# Altium PCB PCB_VHDCI_breakout.PCBDOC (part 1 of 3)
Units mil, origin at the board's own origin, x right, y up, seen from the top; angles counter-clockwise.
Board outline 6299 x 3937 mil, 4 copper layers (TopLayer, Internal Plane 1, Internal Plane 2, BottomLayer), stack 35.551 mil thick; 61 components, 167 nets, 639 pads, 297 vias.
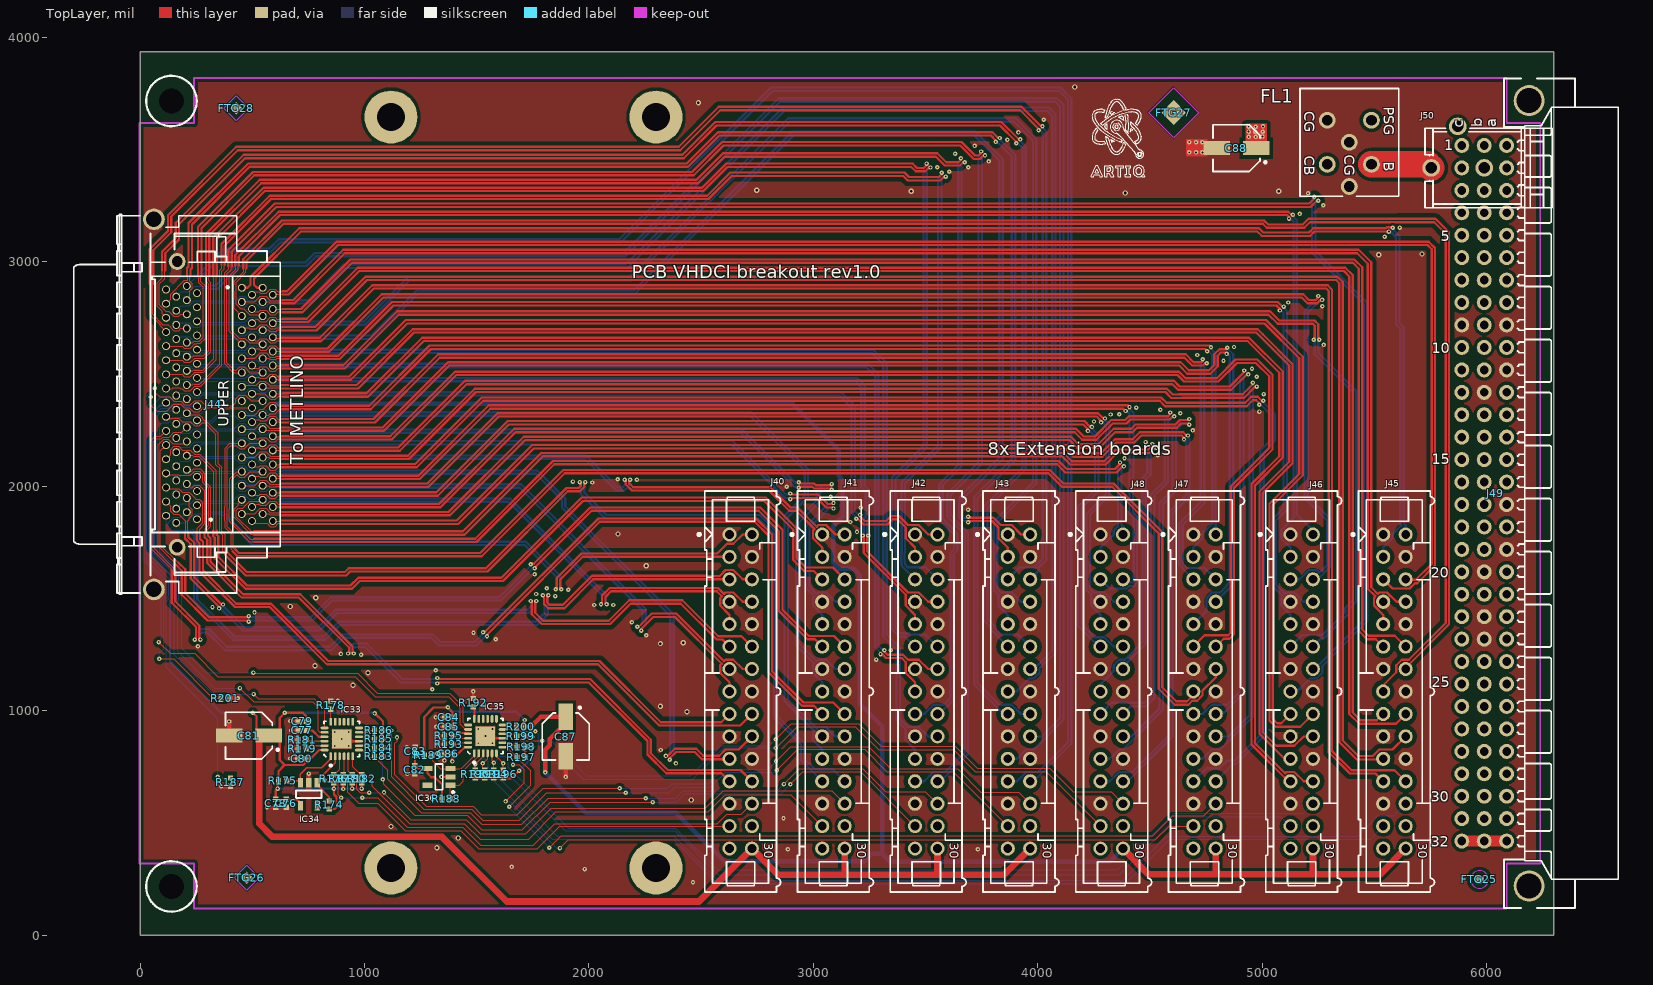
[diagram p0: TopLayer view]
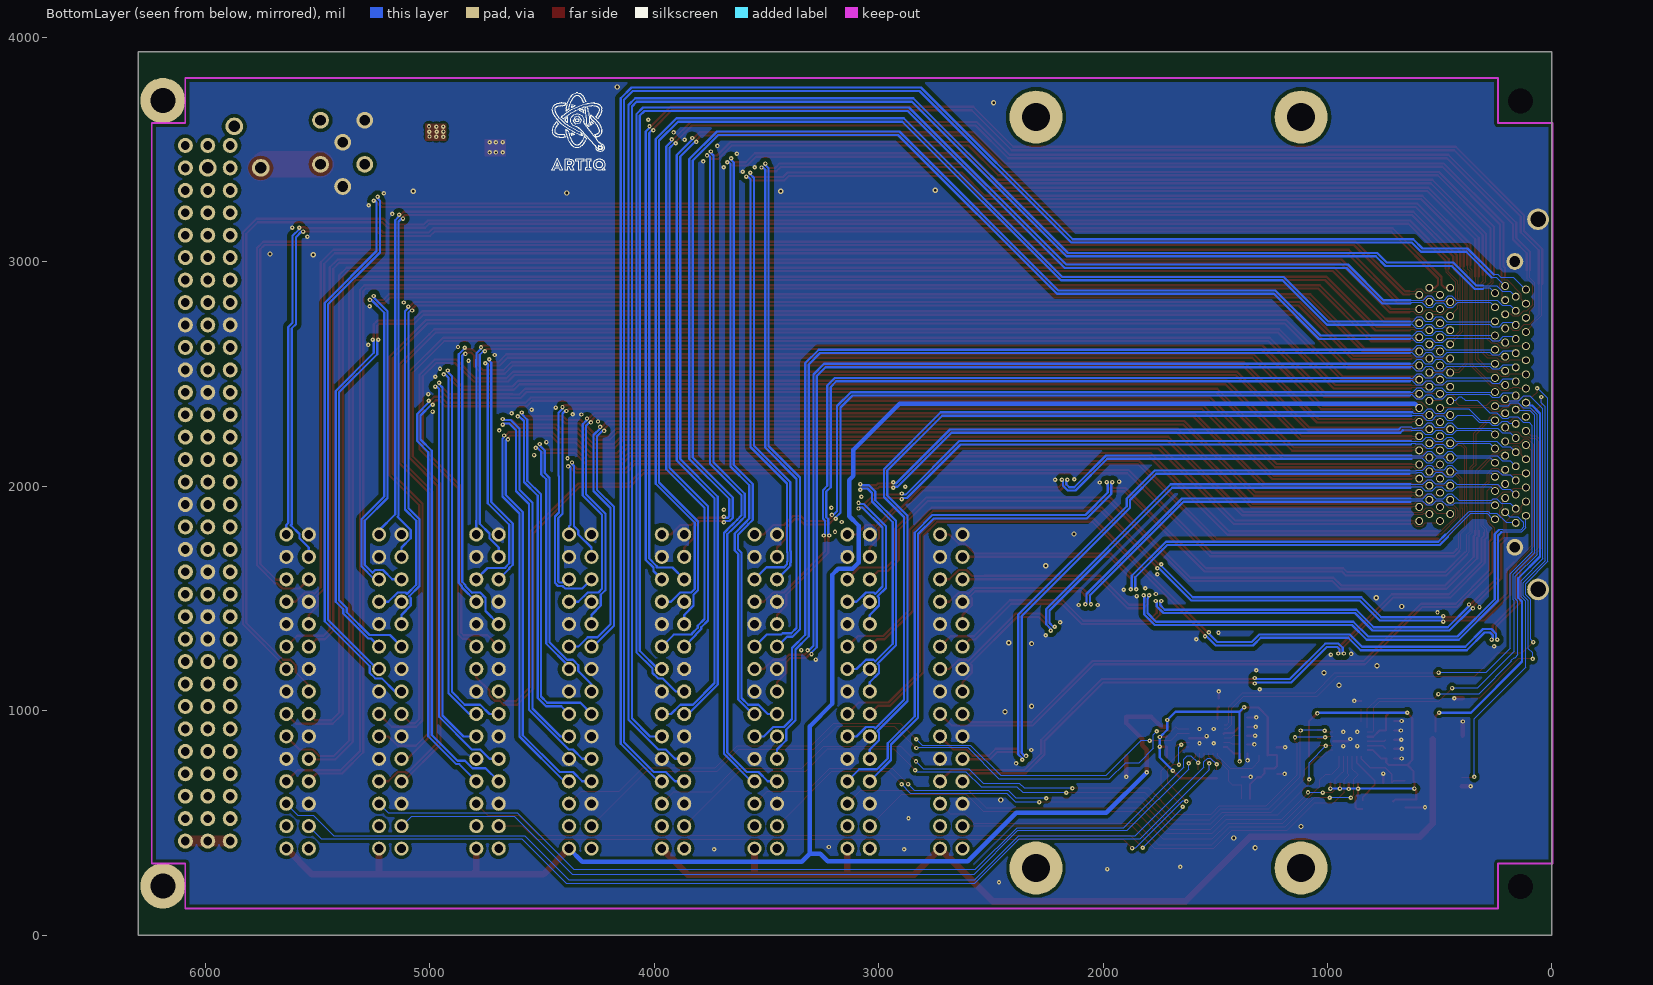
[diagram p1: BottomLayer view, seen from below]
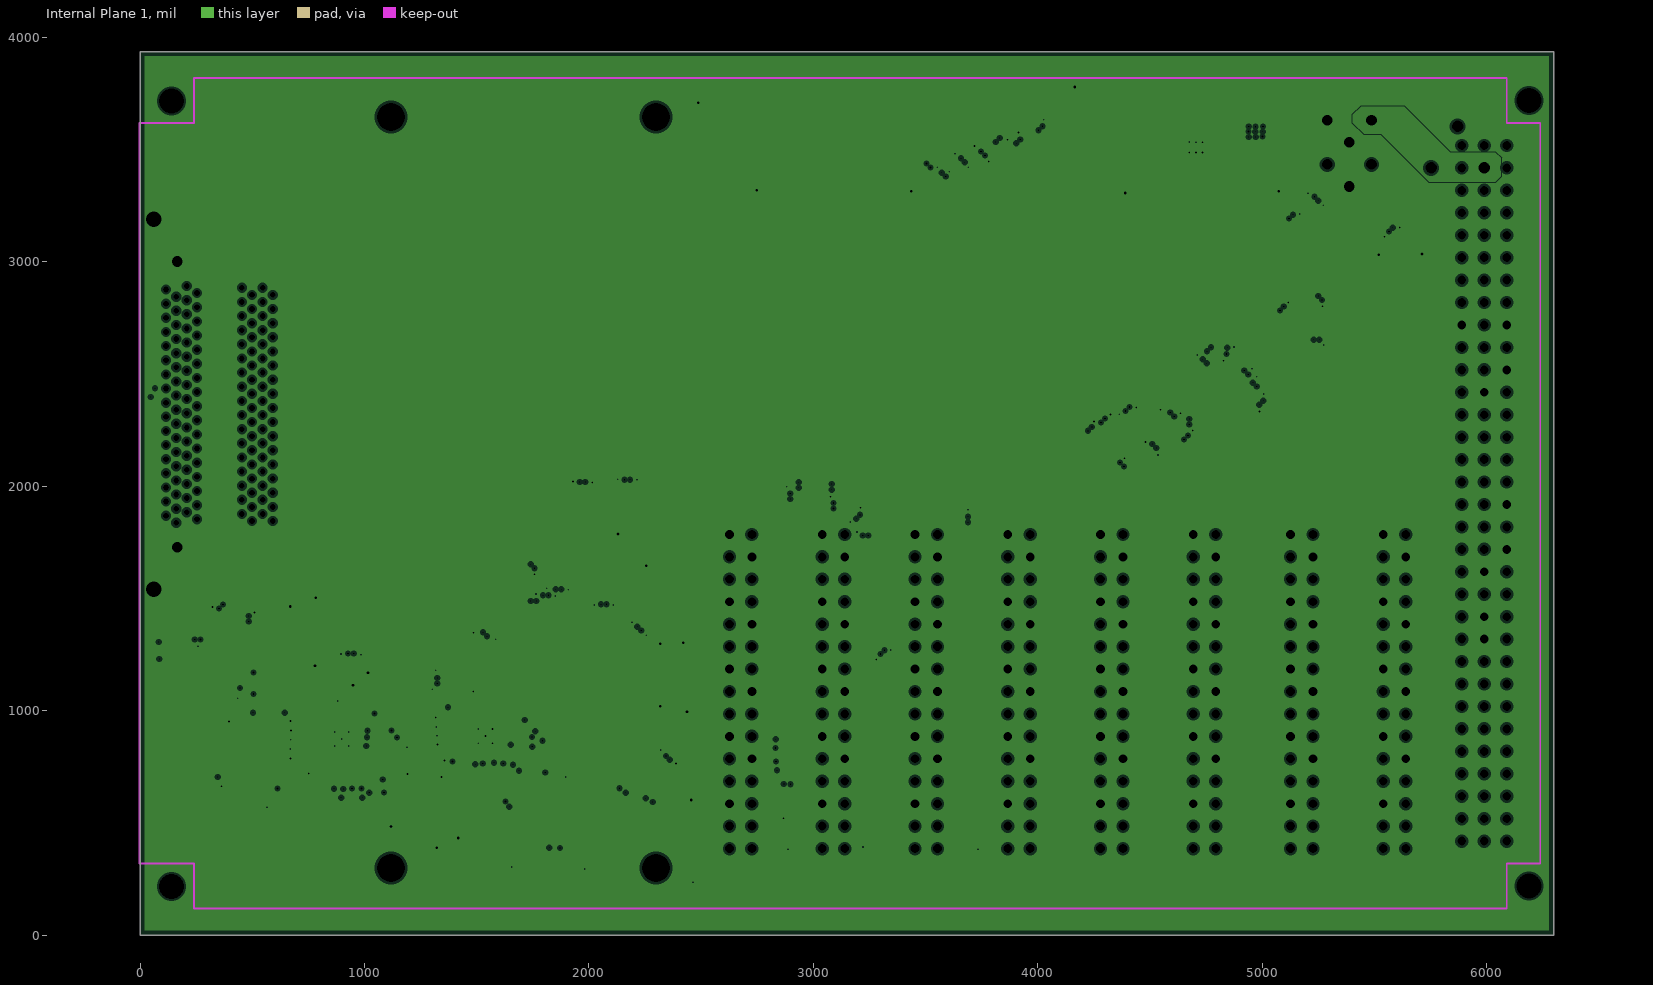
[diagram p2: Internal Plane 1, clearances drawn from the general rule]
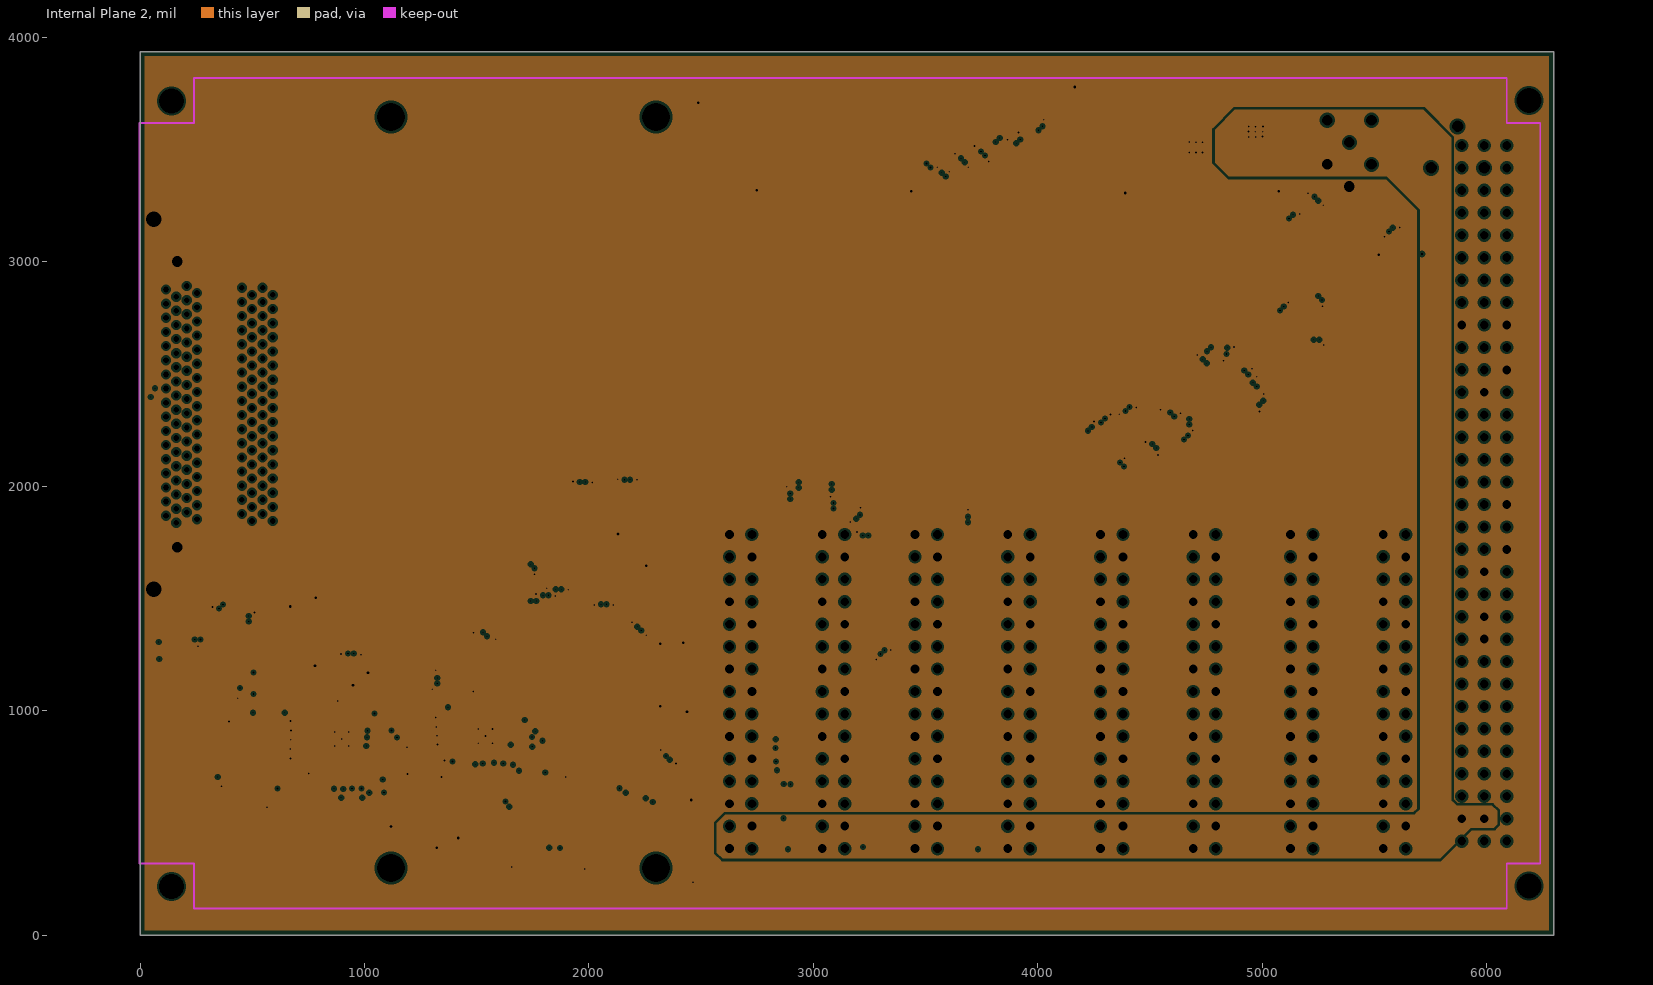
[diagram p3: Internal Plane 2, clearances drawn from the general rule]
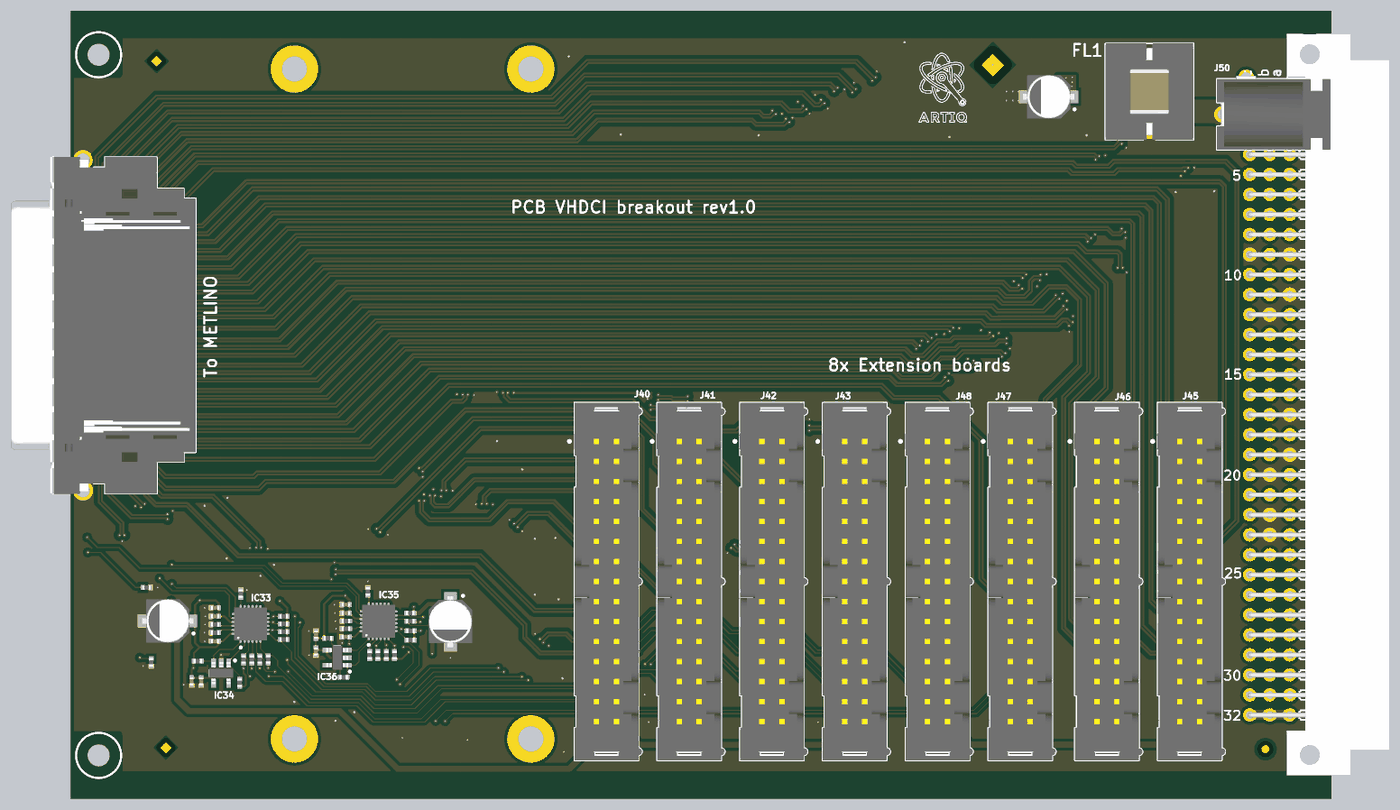
[diagram p6: 3D render of the assembled board from above, using the file's embedded part models]

## Layer stack, top to bottom
TopSolder: solder mask 0.4, Solder Resist, Dk 3.5
TopLayer: signal copper 1.378
Dielectric1: core 15, FR-4, Dk 4.8
Internal Plane 1: plane copper 1.378, net GND
Dielectric 10: prepreg 5, Dk 4.2
Internal Plane 2: plane copper 1.4173, net GND
Dielectric9: core 10, FR-4, Dk 4.2
BottomLayer: signal copper 1.378
BottomSolder: solder mask 0.4, Solder Resist, Dk 3.5

## Board outline
0,0 6299,0 6299,3937 0,3937

## Design rules (kind name [scope] priority, off if disabled: settings)
Clearance Clearance_1 [(InDifferentialPairClass('All Differential Pairs')) vs InPolygon] p1: gap=10 except(20: Arc-Poly Track-Poly SMDPad-Poly THPad-Poly Via-Poly Fill-Poly Poly-Poly)
Clearance [All] p2: gap=5 except(15: Arc-Poly Track-Poly SMDPad-Poly THPad-Poly Via-Poly Fill-Poly)
DiffPairsRouting [All] p1: maxlimit=5 minlimit=5 mostfreqgap=5 toplayer_minwidth=5 toplayer_maxwidth=10 toplayer_prefwidth=10 bottomlayer_minwidth=5 bottomlayer_maxwidth=10 bottomlayer_prefwidth=10 maxuncoupledlength=708.66
FabricationTestPointUsage TestPointUsage [All] p1: valid=0 allowmultiple=FALSE
FabricationTestpoint Testpoint [All] p1: side=3 testpointundercomponent=TRUE minsize=40 maxsize=100 preferedsize=60 minholesize=20 maxholesize=40 preferedholesize=32 testpointgrid=1 allowsidetop=TRUE allowsidebottom=TRUE usegrid=TRUE gridtolerance=0.01
HoleSize [All] p1: absolutevalues=TRUE maxlimit=200 minlimit=1 maxpercent=80.000 minpercent=20.000
MinimumSolderMaskSliver [All] p1: minsoldermaskwidth=0
PlaneClearance [All] p1: clearance=10
PlaneConnect [All] p1: planeconnectstyle=Direct reliefexpansion=20 reliefentries=4 reliefconductorwidth=10 reliefairgap=10
PolygonConnect [All] p1: connectstyle=Direct reliefconductorwidth=10 reliefentries=4 polygonreliefangle="90 Angle" airgapwidth=10
RoomDefinition PCB_VHDCI_breakout [InComponentClass('PCB_VHDCI_breakout')] p1: confinementstyle=ConfineIn formatcopy=TRUE lockcomponents=FALSE outline 6340,60 35.43,60 35.43,3890 6340,3890
RoutingVias [All] p1: holewidth=7.87 width=19.68 viastyle="Through Hole" minholewidth=7.87 minwidth=19.68 maxholewidth=28 maxwidth=50
SilkToSilkClearance [All] p1: silktosilkclearance=0
SilkToSolderMaskClearance SilkscreenOverComponentPads [IsPad] p1: minsilkscreentomaskgap=0 clearancetoexposedcopper=TRUE
SolderMaskExpansion [All] p1: expansion=2
Width [All] p1: maxlimit=168.11 minlimit=5 preferedwidth=10
21 further rules are at their usual default settings.

## Classes and differential pairs
differential pair LVDS1_1: +LVDS1_1_P -LVDS1_1_N
differential pair LVDS1_2: +LVDS1_2_P -LVDS1_2_N
differential pair LVDS1_3: +LVDS1_3_P -LVDS1_3_N
differential pair LVDS1_4: +LVDS1_4_P -LVDS1_4_N
differential pair LVDS1_5: +LVDS1_5_P -LVDS1_5_N
differential pair LVDS1_6: +LVDS1_6_P -LVDS1_6_N
differential pair LVDS1_7: +LVDS1_7_P -LVDS1_7_N
differential pair LVDS1_8: +LVDS1_8_P -LVDS1_8_N
differential pair LVDS2_1: +LVDS2_1_P -LVDS2_1_N
differential pair LVDS2_2: +LVDS2_2_P -LVDS2_2_N
differential pair LVDS2_3: +LVDS2_3_P -LVDS2_3_N
differential pair LVDS2_4: +LVDS2_4_P -LVDS2_4_N
differential pair LVDS2_5: +LVDS2_5_P -LVDS2_5_N
differential pair LVDS2_6: +LVDS2_6_P -LVDS2_6_N
differential pair LVDS2_7: +LVDS2_7_P -LVDS2_7_N
differential pair LVDS2_8: +LVDS2_8_P -LVDS2_8_N
differential pair LVDS3_1: +LVDS3_1_P -LVDS3_1_N
differential pair LVDS3_2: +LVDS3_2_P -LVDS3_2_N
differential pair LVDS3_3: +LVDS3_3_P -LVDS3_3_N
differential pair LVDS3_4: +LVDS3_4_P -LVDS3_4_N
differential pair LVDS3_5: +LVDS3_5_P -LVDS3_5_N
differential pair LVDS3_6: +LVDS3_6_P -LVDS3_6_N
differential pair LVDS3_7: +LVDS3_7_P -LVDS3_7_N
differential pair LVDS3_8: +LVDS3_8_P -LVDS3_8_N
differential pair LVDS4_1: +LVDS4_1_P -LVDS4_1_N
differential pair LVDS4_2: +LVDS4_2_P -LVDS4_2_N
differential pair LVDS4_3: +LVDS4_3_P -LVDS4_3_N
differential pair LVDS4_4: +LVDS4_4_P -LVDS4_4_N
differential pair LVDS4_5: +LVDS4_5_P -LVDS4_5_N
differential pair LVDS4_6: +LVDS4_6_P -LVDS4_6_N
differential pair LVDS4_7: +LVDS4_7_P -LVDS4_7_N
differential pair LVDS4_8: +LVDS4_8_P -LVDS4_8_N
differential pair LVDS5_1: +LVDS5_1_P -LVDS5_1_N
differential pair LVDS5_2: +LVDS5_2_P -LVDS5_2_N
differential pair LVDS5_3: +LVDS5_3_P -LVDS5_3_N
differential pair LVDS5_4: +LVDS5_4_P -LVDS5_4_N
differential pair LVDS5_5: +LVDS5_5_P -LVDS5_5_N
differential pair LVDS5_6: +LVDS5_6_P -LVDS5_6_N
differential pair LVDS5_7: +LVDS5_7_P -LVDS5_7_N
differential pair LVDS5_8: +LVDS5_8_P -LVDS5_8_N
differential pair LVDS6_1: +LVDS6_1_P -LVDS6_1_N
differential pair LVDS6_2: +LVDS6_2_P -LVDS6_2_N
differential pair LVDS6_3: +LVDS6_3_P -LVDS6_3_N
differential pair LVDS6_4: +LVDS6_4_P -LVDS6_4_N
differential pair LVDS6_5: +LVDS6_5_P -LVDS6_5_N
differential pair LVDS6_6: +LVDS6_6_P -LVDS6_6_N
differential pair LVDS6_7: +LVDS6_7_P -LVDS6_7_N
differential pair LVDS6_8: +LVDS6_8_P -LVDS6_8_N
differential pair LVDS7_1: +LVDS7_1_P -LVDS7_1_N
differential pair LVDS7_2: +LVDS7_2_P -LVDS7_2_N
differential pair LVDS7_3: +LVDS7_3_P -LVDS7_3_N
differential pair LVDS7_4: +LVDS7_4_P -LVDS7_4_N
differential pair LVDS7_5: +LVDS7_5_P -LVDS7_5_N
differential pair LVDS7_6: +LVDS7_6_P -LVDS7_6_N
differential pair LVDS7_7: +LVDS7_7_P -LVDS7_7_N
differential pair LVDS7_8: +LVDS7_8_P -LVDS7_8_N
differential pair LVDS8_1: +LVDS8_1_P -LVDS8_1_N
differential pair LVDS8_2: +LVDS8_2_P -LVDS8_2_N
differential pair LVDS8_3: +LVDS8_3_P -LVDS8_3_N
differential pair LVDS8_4: +LVDS8_4_P -LVDS8_4_N
differential pair LVDS8_5: +LVDS8_5_P -LVDS8_5_N
differential pair LVDS8_6: +LVDS8_6_P -LVDS8_6_N
differential pair LVDS8_7: +LVDS8_7_P -LVDS8_7_N
differential pair LVDS8_8: +LVDS8_8_P -LVDS8_8_N

## Components (designator, comment, footprint, x,y, rotation, side; value= is the part's Value field where it differs from the comment)
C76 "100nF" CAPC1005X55N 652.02,587.05 r90 top
C77 "100nF" CAPC1005X55N 722.02,912.05 r0 top
C78 "100nF" CAPC1005X55N 605.02,587.05 r90 top
C79 "100nF" CAPC1005X55N 722.02,954.05 r0 top
C80 "100nF" CAPC1005X55N 721.02,787.05 r0 top
C81 "22uF" CAPAE530X540N 485.02,889.05 r180 top
C82 "100nF" CAPC1005X55N 1225.02,736.05 r90 top
C83 "100nF" CAPC1005X55N 1226.02,820.05 r270 top
C84 "100nF" CAPC1005X55N 1375.02,970.05 r0 top
C85 "100nF" CAPC1005X55N 1375.02,928.05 r0 top
C86 "100nF" CAPC1005X55N 1374.02,809.05 r0 top
C87 "22uF" CAPAE530X540N 1897.02,885.05 r270 top
C88 "22uF" CAPAE530X540N 4886.02,3507.05 r180 top
FL1 "10A/50VDC" FIL_MURATA_BNX002 5389,3533 r270 top
FTG25 "Use only in PCB" FIDUCIAL_TOP_C100-200 5968.5,248.03 r90 top
FTG26 "Use only in PCB" FIDUCIAL_TOP_S100-200 476.38,255.91 r90 top
FTG27 "Use only in PCB" FIDUCIAL_TOP_S200-400 4606.3,3665.35 r0 top
FTG28 "Use only in PCB" FIDUCIAL_TOP_S100-200 429.13,3685.04 r90 top
IC33 "TCA9548ARGER" QFN50P400X400X100-25N-S220 899.02,874.05 r90 top
IC34 "24AA02E48T-I/OT" SOT95P280X145-5N 752.02,628.05 r270 top
IC35 "TCA9548ARGER" QFN50P400X400X100-25N-S220 1539.02,887.05 r90 top
IC36 "24AA02E48T-I/OT" SOT95P280X145-5N 1332.02,705.05 r180 top
J40 "Familly" 3M_N2530-6002RB 2676.57,1085.67 r270 top locked
J41 "Familly" 3M_N2530-6002RB 3089.95,1085.67 r270 top locked
J42 "Familly" 3M_N2530-6002RB 3503.34,1085.67 r270 top locked
J43 "Familly" 3M_N2530-6002RB 3916.72,1085.67 r270 top locked
J44 "VHDCI" MOLEX_74337-0015 353.73,2365.2 r90 top locked
J45 "Familly" 3M_N2530-6002RB 5589.95,1085.67 r270 top locked
J46 "Familly" 3M_N2530-6002RB 5176.57,1085.67 r270 top locked
J47 "Familly" 3M_N2530-6002RB 4743.5,1085.67 r270 top locked
J48 "Familly" 3M_N2530-6002RB 4330.11,1085.67 r270 top locked
J49 "DIN 41612 Type C" "HARTING_09 03 196 2921" 6090,3519 r0 top locked
J50 "Jack" CUI_PJ-102BH 5990,3419 r90 top
R174 "2k2" RESC1005X40N 844.02,580.05 r270 top
R175 "2k2" RESC1005X40N 635.02,688.05 r180 top
R176 "2k2" RESC1005X40N 864.02,696.05 r270 top
R177 "2k2" RESC1005X40N 905.02,696.05 r270 top
R178 "0" RESC1005X40N 850.02,1025.05 r270 top
R179 "0" RESC1005X40N 722.02,830.05 r0 top
R180 "2k2" RESC1005X40N 945.02,696.05 r270 top
R181 "0" RESC1005X40N 722.02,871.05 r0 top
R182 "2k2" RESC1005X40N 987.02,697.05 r270 top
R183 "2k2" RESC1005X40N 1064.02,796.05 r0 top
R184 "2k2" RESC1005X40N 1064.02,835.05 r0 top
R185 "2k2" RESC1005X40N 1064.02,874.05 r0 top
R186 "2k2" RESC1005X40N 1064.02,912.05 r0 top
R187 "0" RESC1005X40N 403.02,682.05 r90 top
R188 "2k2" RESC1005X40N 1364.02,607.05 r180 top
R189 "2k2" RESC1005X40N 1285.02,802.05 r180 top
R190 "2k2" RESC1005X40N 1494.02,718.05 r270 top
R191 "2k2" RESC1005X40N 1535.02,718.05 r270 top
R192 "0" RESC1005X40N 1485.02,1036.05 r270 top
R193 "0" RESC1005X40N 1376.02,850.05 r0 top
R194 "2k2" RESC1005X40N 1577.02,718.05 r270 top
R195 "0" RESC1005X40N 1376.02,888.05 r0 top
R196 "2k2" RESC1005X40N 1618.02,718.05 r270 top
R197 "2k2" RESC1005X40N 1698.02,793.05 r0 top
R198 "2k2" RESC1005X40N 1698.02,839.05 r0 top
R199 "2k2" RESC1005X40N 1697.02,887.05 r0 top
R200 "2k2" RESC1005X40N 1696.02,928.05 r0 top
R201 "0" RESC1005X40N 380.02,1056.05 r180 top

## Footprints (in the part's own frame and the unit in brackets; to place one, negate y for a bottom-side part, rotate by r counter-clockwise, add the part's x,y. Pads: shape width x height; smd on the part's side, far side on the other; paste and mask are expansions set on the pad)
3M_N2530-6002RB [mm] "30 Contacts - Straight .100\" x .100\" Low Profile Four-Wall Header"
  round 1.6 hole 1: 1(-17.78,-1.27) 2(-17.78,1.27) 3(-15.24,-1.27) 4(-15.24,1.27) 5(-12.7,-1.27) 6(-12.7,1.27) 7(-10.16,-1.27) 8(-10.16,1.27) 9(-7.62,-1.27) 10(-7.62,1.27) 11(-5.08,-1.27) 12(-5.08,1.27) 13(-2.54,-1.27) 14(-2.54,1.27) 15(0,-1.27) 16(0,1.27) 17(2.54,-1.27) 18(2.54,1.27) 19(5.08,-1.27) 20(5.08,1.27) 21(7.62,-1.27) 22(7.62,1.27) 23(10.16,-1.27) 24(10.16,1.27) 25(12.7,-1.27) 26(12.7,1.27) 27(15.24,-1.27) 28(15.24,1.27) 29(17.78,-1.27) 30(17.78,1.27)
  silkscreen extent -22.71,-4.85 22.71,4.52, body extent -22.71,-4.11 22.71,4.52, height 9.91
CAPAE530X540N [mm] "Capacitor, Aluminium Electrolytric, 5.3mm L X 5.3mm W X 5.4mm H, IPC Medium Density"
  rect 3x1.6 smd: 1(-2.25,0) 2(2.25,0)
  silkscreen extent -3.4,-2.65 2.65,2.65, body extent -3.25,-2.75 3.25,2.75, height 5.7
CAPC1005X55N [mm] "Chip Capacitor, Body 1.0x0.55mm, IPC Medium Density"
  rect 0.62x0.62 smd: 1(-0.45,0) 2(0.45,0)
  body extent -0.52,-0.27 0.53,0.28, height 0.55
CUI_PJ-102BH [mm] "2.5 mm Center Pin, 5A, 24V Right Angle, Through Hole, Tapered Pins, DC Power Jack Connector"
  round 2 hole 1.3: 1(0,6) 2(0,0) 3(4.7,3)
  silkscreen extent -4.5,-7.7 4.5,6.7, body extent -4.5,-7.7 4.9,6.7, height 11
FIDUCIAL_TOP_C100-200 [mm] "Round Fiducial Target, Top Layer, 1.0mm, Top Solder 2.0mm, Keepout =2.0mm"
  round 1 smd paste-0.51 mask+0.5: FTG2(0,0)
  TopLayer keep-out circle w0.1: c0,0 r1
FIDUCIAL_TOP_S100-200 [mm] "Square Fiducial Target, Top Layer, 1.0mm, Top Solder 2.0mm, Keepout =2.0mm"
  rect 1x1 smd rot 45 paste-0.51 mask+0.5: 1(0,0)
  TopLayer keep-out region: 1.414,0 0,-1.414 -1.414,0 0,1.414
FIDUCIAL_TOP_S200-400 [mm] "Square Fiducial Target, Top Layer, 2.0mm, Top Solder 4.0mm, Keepout =4.0mm"
  rect 2x2 smd rot 45 paste-0.9 mask+1: 1(0,0)
  TopLayer keep-out region: -2.839,0.011 -0.011,2.839 2.818,0.011 -0.011,-2.818
FIL_MURATA_BNX002 [mm] "Block Type EMIFIL LC Combined Type, BNX002 Series"
  round 1.9 hole 1.2: 1(2.5,2.5) 2(2.5,-2.5) 3(-2.5,2.5) 4(-2.5,-2.5) 4(0,0) 4(5,0)
  silkscreen extent -6.1,-5.6 6.1,5.6, body extent -6.1,-5.6 6.1,5.6, height 12.5
"HARTING_09 03 196 2921" [mm] "Connector; DIN 41612, Type C, Thru-Hole; Rows a+b+c, 96 Position; Right Angle"
  round 1.7 hole 1: a1(0,0) a2(0,-2.54) a3(0,-5.08) a4(0,-7.62) a5(0,-10.16) a6(0,-12.7) a7(0,-15.24) a8(0,-17.78) a9(0,-20.32) a10(0,-22.86) a11(0,-25.4) a12(0,-27.94) a13(0,-30.48) a14(0,-33.02) a15(0,-35.56) a16(0,-38.1) a17(0,-40.64) a18(0,-43.18) a19(0,-45.72) a20(0,-48.26) a21(0,-50.8) a22(0,-53.34) a23(0,-55.88) a24(0,-58.42) a25(0,-60.96) a26(0,-63.5) a27(0,-66.04) a28(0,-68.58) a29(0,-71.12) a30(0,-73.66) a31(0,-76.2) a32(0,-78.74) b1(-2.54,0) b2(-2.54,-2.54) b3(-2.54,-5.08) b4(-2.54,-7.62) b5(-2.54,-10.16) b6(-2.54,-12.7) b7(-2.54,-15.24) b8(-2.54,-17.78) b9(-2.54,-20.32) b10(-2.54,-22.86) b11(-2.54,-25.4) b12(-2.54,-27.94) b13(-2.54,-30.48) b14(-2.54,-33.02) b15(-2.54,-35.56) b16(-2.54,-38.1) b17(-2.54,-40.64) b18(-2.54,-43.18) b19(-2.54,-45.72) b20(-2.54,-48.26) b21(-2.54,-50.8) b22(-2.54,-53.34) b23(-2.54,-55.88) b24(-2.54,-58.42) b25(-2.54,-60.96) b26(-2.54,-63.5) b27(-2.54,-66.04) b28(-2.54,-68.58) b29(-2.54,-71.12) b30(-2.54,-73.66) b31(-2.54,-76.2) b32(-2.54,-78.74) c1(-5.08,0) c2(-5.08,-2.54) c3(-5.08,-5.08) c4(-5.08,-7.62) c5(-5.08,-10.16) c6(-5.08,-12.7) c7(-5.08,-15.24) c8(-5.08,-17.78) c9(-5.08,-20.32) c10(-5.08,-22.86) c11(-5.08,-25.4) c12(-5.08,-27.94) c13(-5.08,-30.48) c14(-5.08,-33.02) c15(-5.08,-35.56) c16(-5.08,-38.1) c17(-5.08,-40.64) c18(-5.08,-43.18) c19(-5.08,-45.72) c20(-5.08,-48.26) c21(-5.08,-50.8) c22(-5.08,-53.34) c23(-5.08,-55.88) c24(-5.08,-58.42) c25(-5.08,-60.96) c26(-5.08,-63.5) c27(-5.08,-66.04) c28(-5.08,-68.58) c29(-5.08,-71.12) c30(-5.08,-73.66) c31(-5.08,-76.2) c32(-5.08,-78.74)
  round 3.5 / inner round 3.5 / far side round 5.1 hole 2.8: MTG1(2.54,5.08) MTG2(2.54,-83.82)
  silkscreen extent -0.31,-86.32 12.64,7.58, body extent -5.38,-86.37 12.64,7.63, height 9.35
MOLEX_74337-0015 [mm] "2x68 Positions, Pitch 0.8mm, Very Hight Density Right Angle Dual Stacked VHDCI Receptacle"
  round 1.9 hole 1.2: 69(-16.175,4.79) 71(16.175,4.79)
  round 2.45 hole 1.75: 70(-20.95,7.41) 72(20.95,7.41)
  round 0.9 hole 0.65: L1(-13.005,2.54) L2(-12.205,3.69) L3(-11.405,2.54) L4(-10.605,3.69) L5(-9.805,2.54) L6(-9.005,3.69) L7(-8.205,2.54) L8(-7.405,3.69) L9(-6.605,2.54) L10(-5.805,3.69) L11(-5.005,2.54) L12(-4.205,3.69) L13(-3.405,2.54) L14(-2.605,3.69) L15(-1.805,2.54) L16(-1.005,3.69) L17(-0.205,2.54) L18(0.595,3.69) L19(1.395,2.54) L20(2.195,3.69) L21(2.995,2.54) L22(3.795,3.69) L23(4.595,2.54) L24(5.395,3.69) L25(6.195,2.54) L26(6.995,3.69) L27(7.795,2.54) L28(8.595,3.69) L29(9.395,2.54) L30(10.195,3.69) L31(10.995,2.54) L32(11.795,3.69) L33(12.595,2.54) L34(13.395,3.69) L35(-13.405,4.89) L36(-12.605,6.04) L37(-11.805,4.89) L38(-11.005,6.04) L39(-10.205,4.89) L40(-9.405,6.04) L41(-8.605,4.89) L42(-7.805,6.04) L43(-7.005,4.89) L44(-6.205,6.04) L45(-5.405,4.89) L46(-4.605,6.04) L47(-3.805,4.89) L48(-3.005,6.04) L49(-2.205,4.89) L50(-1.405,6.04) L51(-0.605,4.89) L52(0.195,6.04) L53(0.995,4.89) L54(1.795,6.04) L55(2.595,4.89) L56(3.395,6.04) L57(4.195,4.89) L58(4.995,6.04) L59(5.795,4.89) L60(6.595,6.04) L61(7.395,4.89) L62(8.195,6.04) L63(8.995,4.89) L64(9.795,6.04) L65(10.595,4.89) L66(11.395,6.04) L67(12.195,4.89) L68(12.995,6.04) U1(13.195,-2.54) U2(12.395,-3.69) U3(11.595,-2.54) U4(10.795,-3.69) U5(9.995,-2.54) U6(9.195,-3.69) U7(8.395,-2.54) U8(7.595,-3.69) U9(6.795,-2.54) U10(5.995,-3.69) U11(5.195,-2.54) U12(4.395,-3.69) U13(3.595,-2.54) U14(2.795,-3.69) U15(1.995,-2.54) U16(1.195,-3.69) U17(0.395,-2.54) U18(-0.405,-3.69) U19(-1.205,-2.54) U20(-2.005,-3.69) U21(-2.805,-2.54) U22(-3.605,-3.69) U23(-4.405,-2.54) U24(-5.205,-3.69) U25(-6.005,-2.54) U26(-6.805,-3.69) U27(-7.605,-2.54) U28(-8.405,-3.69) U29(-9.205,-2.54) U30(-10.005,-3.69) U31(-10.805,-2.54) U32(-11.605,-3.69) U33(-12.405,-2.54) U34(-13.205,-3.69) U35(13.195,-4.89) U36(12.395,-6.04) U37(11.595,-4.89) U38(10.795,-6.04) U39(9.995,-4.89) U40(9.195,-6.04) U41(8.395,-4.89) U42(7.595,-6.04) U43(6.795,-4.89) U44(5.995,-6.04) U45(5.195,-4.89) U46(4.395,-6.04) U47(3.595,-4.89) U48(2.795,-6.04) U49(1.995,-4.89) U50(1.195,-6.04) U51(0.395,-4.89) U52(-0.405,-6.04) U53(-1.205,-4.89) U54(-2.005,-6.04) U55(-2.805,-4.89) U56(-3.605,-6.04) U57(-4.405,-4.89) U58(-5.205,-6.04) U59(-6.005,-4.89) U60(-6.805,-6.04) U61(-7.605,-4.89) U62(-8.405,-6.04) U63(-9.205,-4.89) U64(-10.005,-6.04) U65(-10.805,-4.89) U66(-11.605,-6.04) U67(-12.405,-4.89) U68(-13.205,-6.04)
  silkscreen extent -21.5,-6.89 21.5,16.5, body extent -21.5,-6.89 21.5,16.5, height 12.77
QFN50P400X400X100-25N-S220 [mm] "QFN, 0.50mm Pitch, Square; 24 Pin, 4.00mm L X 4.00mm W X 1.00mm H body (w/thermal tab 2.2 X 2.2mm), IPC Medium Density"
  oval 0.9x0.3 smd: 1(-1.95,1.25) 2(-1.95,0.75) 3(-1.95,0.25) 4(-1.95,-0.25) 5(-1.95,-0.75) 6(-1.95,-1.25) 13(1.95,-1.25) 14(1.95,-0.75) 15(1.95,-0.25) 16(1.95,0.25) 17(1.95,0.75) 18(1.95,1.25)
  oval 0.3x0.9 smd: 7(-1.25,-1.95) 8(-0.75,-1.95) 9(-0.25,-1.95) 10(0.25,-1.95) 11(0.75,-1.95) 12(1.25,-1.95) 19(1.25,1.95) 20(0.75,1.95) 21(0.25,1.95) 22(-0.25,1.95) 23(-0.75,1.95) 24(-1.25,1.95)
  rect 2.2x2.2 smd: 25(0,0)
  silkscreen extent -3.12,-2 2,2, body extent -2.07,-2.07 2.08,2.08, height 1
RESC1005X40N [mm] "Chip Resistor, EIA 0402, Metric 1005, Body 1.0x0.5mm, IPC Medium Density"
  rect 0.58x0.62 smd: 1(-0.47,0) 2(0.47,0)
  body extent -0.52,-0.27 0.53,0.28, height 0.4
SOT95P280X145-5N [mm] "SOT, 0.95mm pitch; 5 pin, 1.60mm W X 2.90mm L X 1.45mm H body, IPC Medium Density"
  rect 1.1x0.6 smd: 1(-1.3,0.95) 2(-1.3,0) 3(-1.3,-0.95) 4(1.3,-0.95) 5(1.3,0.95)
  silkscreen extent -1.72,-1.45 0.43,1.88, body extent -1.4,-1.5 1.4,1.5, height 1.45

## Part data
C76 C77 C78 C79 C80 C82 C83 C84 C85 C86: library part CC0402_100NF_16V_10%_X5R, "Non-polarised capacitor"
C81 C87 C88: library part CAE530-540_22UF_16V_20%, "Polarised capacitor"
FL1: library part FIL_MURATA_BNX002-01, "Block Type EMIFIL (LC Combined)"
FTG25: library part FIDUCIAL_TARGET_C100-200, "Fiducial Target"
FTG26 FTG28: library part FIDUCIAL_TARGET_S100-200, "Fiducial Target"
FTG27: library part FIDUCIAL_TARGET_S200-400, "Fiducial Target"
IC33 IC35: "Low Voltage 8-Channel I2C Switch With Reset"
IC34 IC36: "1.7V-5.5V, 2K I2C Serial EEPROM With EUI-48 Node Identity"
J40 J41 J42 J43 J45 J46 J47 J48: library part 3M_N2530-6002RB, "Connector 30 Male"
J44: library part MOLEX_74337-0015, "Very High Density Cable Interconnect (VHDCI ) 2x68 Female"
J49: library part "HARTING_09 03 196 2921", "Connector 96abc male (3x32)"
J50: library part CUI_PJ-102BH, "2.5 mm Center Pin, 5A, 24V Right Angle, Through Hole, Tapered Pins, DC Power Jack Connector"
R174 R175 R176 R177 R180 R182 R183 R184 R185 R186 R188 R189 R190 R191 R194 R196 R197 R198 R199 R200: library part R0402_2K2_1%_0.0625W_100PPM, "Resistor - 1%"
R178 R179 R181 R187 R192 R193 R195 R201: library part R0402_0R_JUMPER, "Resistor"

## Free pads (board coordinates)
  round 236.22 hole 125.98: 0(2299.21,299.21) 1(2299.21,3645.67) 2(1118.11,3645.67) 3(1118.11,299.21)
  round 50 hole 110: 1(140,3717) 2(140,217)

## Via types
v1: diameter 19.68, hole 7.87, TopLayer to BottomLayer, tented both sides, 274 vias
v2: diameter 23.62, hole 11.81, TopLayer to BottomLayer, tented both sides, 23 vias

## Nets (pads, with @x,y where several pads share a name; then routed paths per layer and width w, separated by ;. In a path a pad name is that pad's centre, name@x,y a point inside that pad or via, vN(x,y) a via of type N, cw(c..) or ccw(c..) an arc to the next point about the centre after c; other vN are vias at no path point)
GND: C76.1 C77.1 C78.1 C79.1 C80.1 C81.2 C82.1 C83.1 C84.1 C85.1 C86.1 C87.2 C88.2 FL1.4 IC33.9 IC33.25 IC34.2 IC35.9 IC35.25 IC36.2 J40.1 J40.4 J40.7 J40.10 J40.13 J40.16 J40.19 J40.22 J40.25 J41.1 J41.4 J41.7 J41.10 J41.13 J41.16 J41.19 J41.22 J41.25 J42.1 J42.4 J42.7 J42.10 J42.13 J42.16 J42.19 J42.22 J42.25 J43.1 J43.4 J43.7 J43.10 J43.13 J43.16 J43.19 J43.22 J43.25 J44.69 J44.70 J44.71 J44.72 J45.1 J45.4 J45.7 J45.10 J45.13 J45.16 J45.19 J45.22 J45.25 J46.1 J46.4 J46.7 J46.10 J46.13 J46.16 J46.19 J46.22 J46.25 J47.1 J47.4 J47.7 J47.10 J47.13 J47.16 J47.19 J47.22 J47.25 J48.1 J48.4 J48.7 J48.10 J48.13 J48.16 J48.19 J48.22 J48.25 J49.a9 J49.a11 J49.a17 J49.a19 J49.b12 J49.b20 J49.b22 J49.b23 J49.c9 R178.1 R179.1 R181.1 R187.1 R192.1 R193.1 R195.1 R201.1 | length 1033
  TopLayer w10: v1(565.59,570.05) 566.31,569.34 C78.1@605.02,569.34 C76.1@652.02,569.34 ; v1(669.02,830.05) R179.1@703.52,830.05 ; v1(670.02,787.05) C80.1@703.31,787.05 ; v1(670.02,954.05) C79.1@704.31,954.05 ; v1(671.02,871.05) R181.1@703.52,871.05 ; v1(673.02,912.05) C77.1@704.31,912.05 ; IC34.2@752.02,679.24 v1(752.02,720.05) ; R178.1@850.02,1043.56 v1(880.53,1043.56) ; v1(899.02,874.05) 908.87,864.21 IC33.9@975.8,864.21 ; v1(1189.31,837.77) C83.1@1226.02,837.77 ; v1(1191.31,718.34) C82.1@1225.02,718.34 ; v1(1318.02,970.05) C84.1@1357.31,970.05 ; v1(1320.02,928.05) C85.1@1357.31,928.05 ; v1(1323.02,888.05) R195.1@1357.52,888.05 ; v1(1326.02,850.05) R193.1@1357.52,850.05 ; v1(1343.02,705.05) IC36.2@1383.2,705.05 ; v1(1356.31,778.77) C86.1@1356.31,809.05 ; R192.1@1485.02,1054.56 v1(1485.02,1086.05) ; v1(1539.02,887.05) 1548.87,877.21 IC35.9@1615.8,877.21
  TopLayer w20: v1(362.53,663.55) R187.1@403.02,663.55 ; C81.2@396.44,889.05 396.44,952.47 v1(396.86,952.05) ; R201.1@398.53,1056.05 v1(435.02,1056.05) ; v1(1897.02,705.05) C87.2@1897.02,796.47
  other v1: 2463.97,235.28 1981.69,294.33 1656.88,304.17 2887.2,382.91 3733.65,382.91 3221.84,392.76 2867.51,520.71 2388.02,765.05 2320.02,825.05 867.53,842.56 930.52,842.56 1507.52,855.56 1570.52,855.56 867.53,905.55 930.52,905.55 1507.52,918.55 1570.52,918.55 1302.02,1096.05 1318.02,1180.05 3281.02,1228.05 985.02,1249.05 895.02,1253.05 3345.02,1270.05 258,1287 1585.02,1319.05 2256.02,1336.05 1486.02,1347.05 2192.02,1394.05 510.02,1438.05 323.02,1462.05 2024.02,1471.05 2109.02,1471.05 1850.02,1511.05 1765.02,1520.05 1908.02,1539.05 1812.02,1546.05 1758.02,1608.05 3195.02,1797.05 3165.02,1841.05 3690.02,1896.05 3211.02,1904.05 3077.02,1953.05 2882.02,1998.05 2015.02,2017.05 1929.02,2021.05 2214.02,2029.05 2129.02,2032.05 4387.02,2125.05 4536.02,2139.05 4481.02,2197.05 4691.02,2249.05 4251.02,2289.05 4325.02,2320.05 4364,2321 4636.02,2326.05 4988.02,2333.05 4547.02,2341.05 4439,2351 5007.02,2411.05 4976.02,2488.05 4955.02,2524.05 4828.02,2560.05 4711.02,2585.05 4875.02,2621.05 5275.02,2630.05 5269.02,2802.05 5117.02,2819.05 5546.02,3112.05 5613.02,3153.05 5168.02,3214.05 5273.02,3252.05 5205.02,3306.05 3606.02,3402.05 3553.02,3422.05 3691.02,3422.05 3782.02,3448.05 3632.02,3482.05 4675.02,3488.05 4706.02,3488.05 4734.02,3488.05 3719.02,3517.05 4706.02,3533.05 4734.02,3533.05 4675.02,3534.05 3865.02,3544.05 3914.02,3577.05 4027.02,3634.05
  other v2: 1322.83,389.76 1417.32,433.07 1118.11,484.25 2456.69,602.36 2437.01,996.06 2318.9,1019.69 948.82,1114.17 1015.75,1169.29 779.53,1200.79 2318.9,1299.21 2421.26,1303.15 669.29,1464.57 783.46,1503.94 2255.91,1645.67 2129.92,1787.4 5519.68,3031.5 5712.6,3035.43 4389.76,3307.09 3437.01,3314.96 5074.8,3314.96 2748.03,3318.9 2488.19,3708.66 4165.35,3779.53
I2C1_SCL: IC33.4 J40.27 R177.1 | length 2019.1
  TopLayer w5: IC33.4@908.87,797.28 908.87,718.4 R177.1@905.02,714.56 905.02,713.05 925.02,693.05 925.02,636.05 974.02,587.05 1059.02,587.05 1182.02,464.05 1430.02,464.05 1510.02,384.05 1769.02,384.05 1870.64,485.67 J40.27@2626.57,485.67
I2C1_SDA: IC33.3 J40.26 R176.1 | length 2203.9
  TopLayer w5: IC33.3@889.18,797.28 889.18,739.72 R176.1@864.02,714.56 883.73,694.85 883.73,625.35 v1@891.52,617.55 ; v1@891.02,617.05 v1(896.02,612.05) ; v1(990.02,612.05) 1060.02,612.05 1191.02,481.05 1437.02,481.05 1518.02,400.05 1753.02,400.05 1849.02,496.05 2572.02,496.05 2615.02,539.05 2679.95,539.05 J40.26@2726.57,585.67
  BottomLayer w5: v1(896.02,612.05) v1(990.02,612.05)
I2C2_SCL: IC33.6 J41.27 R182.1 | length 2425.9
  TopLayer w5: IC33.6@948.24,797.28 948.24,750.35 R182.1@984.02,714.56 ; R182.1@987.02,715.56 1010.52,715.56 1034.02,692.05 1034.02,664.53 1201.26,497.29 1445.79,497.29 1515.02,428.05 1731.02,428.05 1853.02,550.05 2531.02,550.05 2607.02,626.05 2899.57,626.05 J41.27@3039.96,485.67
I2C2_SDA: IC33.5 J41.26 R180.1 | length 2525.3
  TopLayer w5: IC33.5@928.55,797.28 928.55,731.03 R180.1@945.02,714.56 966.02,693.56 966.02,649.53 980.5,635.05 v1(1021.02,635.05) ; v1@1085.52,634.55 1206.52,513.55 1453.52,513.55 1516.02,451.05 1719.02,451.05 1833.02,565.05 2519.02,565.05 2598.02,644.05 3081.57,644.05 J41.26@3139.96,585.67
  BottomLayer w5: v1(1021.02,635.05) 1086.02,635.05 v1(1087.02,636.05)
I2C3_SCL: IC33.8 J42.27 R184.1 | length 2935.7
  TopLayer w5: IC33.8@975.8,844.53 1006.55,844.53 v1(1008.02,843.05) 1037.52,843.05 R184.1@1045.52,835.05 ; v1(1082.02,694.05) 1086.02,690.05 1086.02,673.05 1225.02,534.05 1457.02,534.05 1522.02,469.05 1703.02,469.05 1827.02,593.05 2246.5,593.05 2246.84,592.71 2284.68,592.71 v1(2285.02,593.05) ; v1(2898.02,672.05) 2954.02,728.05 3210.96,728.05 J42.27@3453.34,485.67
  BottomLayer w5: v1(1008.02,843.05) 1082.02,769.05 v1(1082.02,694.05) ; v1(2285.02,593.05) 2389.02,593.05 2427.02,631.05 2857.02,631.05 v1(2898.02,672.05)
I2C3_SDA: IC33.7 J42.26 R183.1 | length 2907.2
  TopLayer w5: IC33.7@975.8,824.84 993.24,824.84 1025.52,792.56 1045.52,792.56 1104.02,734.05 1104.02,695.05 1253.52,545.55 1470.52,545.55 1522.02,494.05 1702.02,494.05 1818.02,610.05 v1(2254.02,610.05) v1@2252.02,608.05 ; v1(2869.02,673.05) 2937.02,741.05 3221.02,741.05 3323.02,639.05 3499.96,639.05 J42.26@3553.34,585.67
  BottomLayer w5: v1(2254.02,610.05) 2254.37,610.4 2292.21,610.4 2292.55,610.05 2388.02,610.05 2421.02,643.05 2839.02,643.05 v1(2869.02,673.05)
I2C4_SCL: IC33.11 J43.27 R186.1 | length 3485.8
  TopLayer w5: IC33.11@975.8,903.58 1005.55,903.58 v1(1013.02,911.05) 1014.02,912.05 R186.1@1045.52,912.05 ; v1(1120.02,912.05) 1121.02,911.05 1121.02,706.05 1265.02,562.05 1477.02,562.05 1527.02,512.05 1690.02,512.05 1812.02,634.05 v1(2164.02,634.05) ; v1(2838.02,735.05) 2931.02,828.05 3229.46,828.05 3328.46,729.05 3623.34,729.05 J43.27@3866.73,485.67
  BottomLayer w5: v1(1013.02,911.05) 1014.02,912.05 v1(1120.02,912.05) ; v1(2164.02,634.05) 2357.02,634.05 2382.02,659.05 2542.02,659.05 2609.02,726.05 2829.02,726.05 v1(2838.02,735.05)
I2C4_SDA: IC33.10 J43.26 R185.1 | length 3516.7
  TopLayer w5: IC33.10@975.8,883.9 1009.18,883.9 v1(1011.02,882.05) 1019.02,874.05 R185.1@1045.52,874.05 ; v1(1145.02,881.05) 1145.02,863.05 1136.02,854.05 1136.02,714.05 1276.02,574.05 1484.02,574.05 1521.02,537.05 1680.02,537.05 1797.02,654.05 v1(2137.02,654.05) v1@2135.02,656.05 ; v1(2834.02,774.05) 2900.02,840.05 3246.98,840.05 3345.98,741.05 3643.02,741.05 3747.02,637.05 3915.34,637.05 J43.26@3966.73,585.67
  BottomLayer w5: v1(1011.02,882.05) 1144.02,882.05 v1(1145.02,881.05) ; v1(2137.02,654.05) 2350.02,654.05 2371.02,675.05 2533.02,675.05 2597.02,739.05 2799.02,739.05 v1(2834.02,774.05)
I2C5_SCL: IC35.4 J45.27 R191.1 | length 4445.1
  TopLayer w5: R191.1@1535.02,736.56 1527.02,744.56 v1(1527.02,765.05) 1548.87,786.9 IC35.4@1548.87,810.28
  BottomLayer w5: v1(1527.02,765.05) 1527.02,736.05 1836.02,427.05 2376.02,427.05 2575.02,228.05 4390.02,228.05 4589.02,427.05 5481.34,427.05 J45.27@5539.96,485.67
I2C5_SDA: IC35.3 J45.26 R190.1 | length 4624.6
  TopLayer w5: R190.1@1494.02,736.56 v1(1494.02,761.05) 1529.18,796.21 IC35.3@1529.18,810.28
  BottomLayer w5: v1(1494.02,761.05) 1520.02,787.05 1537.02,787.05 1551.02,773.05 1551.02,749.05 1859.02,441.05 2379.02,441.05 2575.02,245.05 4379.02,245.05 4575.02,441.05 5426.02,441.05 5518.02,533.05 5587.34,533.05 J45.26@5639.96,585.67
I2C6_SCL: IC35.6 J46.27 R196.1 | length 3941
  TopLayer w5: IC35.6@1588.24,810.28 1588.24,796.84 1618.02,767.05 v1(1618.02,765.05) ; R196.1@1618.02,736.56 v1(1618.02,765.05) ; v1@1619.02,766.05 v1(1618.02,765.05)
  BottomLayer w5: v1(1618.02,765.05) 1618.02,740.05 1894.02,464.05 2382.02,464.05 2577.02,269.05 4363.02,269.05 4622.02,528.05 5084.19,528.05 J46.27@5126.57,485.67
I2C6_SDA: IC35.5 J46.26 R194.1 | length 4092.9
  TopLayer w5: IC35.5@1568.55,810.28 1568.55,776.53 v1(1577.02,768.05) R194.1@1577.02,736.56
  BottomLayer w5: v1(1577.02,768.05) 1607.02,798.05 1627.02,798.05 1641.02,784.05 1641.02,747.05 1911.02,477.05 2386.02,477.05 2572.02,291.05 4357.61,291.05 4609.61,543.05 5183.95,543.05 J46.26@5226.57,585.67
I2C7_SCL: IC35.8 J47.27 R198.1 | length 3589.2
  TopLayer w5: IC35.8@1615.8,857.53 1642.55,857.53 v1(1652.02,848.05) 1670.52,848.05 R198.1@1679.52,839.05 ; v1(1629.02,596.05) 1711.02,678.05 1711.02,738.05 1690.02,759.05 v1(1662.02,759.05) ; v1(1871.02,388.05) 1908.02,425.05 4525.02,425.05 4585.64,485.67 J47.27@4693.5,485.67
  BottomLayer w5: v1(1629.02,596.05) 1648.02,596.05 1856.02,388.05 v1(1871.02,388.05) ; v1(1652.02,848.05) 1662.02,838.05 v1(1662.02,759.05)
I2C7_SDA: IC35.7 J47.26 R197.1 | length 3676.3
  TopLayer w5: IC35.7@1615.8,837.84 1634.73,837.84 R197.1@1679.52,793.05 1740.02,732.55 1740.02,667.05 v1(1645.02,572.05) ; v1(1823.02,389.05) 1876.02,442.05 4512.02,442.05 4602.02,532.05 4739.88,532.05 J47.26@4793.5,585.67
  BottomLayer w5: v1(1645.02,572.05) 1645.02,567.05 v1(1823.02,389.05)
I2C8_SCL: IC35.11 J48.27 R200.1 | length 3081.6
  TopLayer w5: IC35.11@1615.8,916.58 1666.05,916.58 R200.1@1677.52,928.05 1697.52,908.05 v1(1761.02,908.05) ; v1(2832.02,834.05) 2834.02,834.05 2929.02,929.05 3187.02,929.05 3291.02,825.05 3625.02,825.05 3722.02,728.05 4037.73,728.05 J48.27@4280.11,485.67
  BottomLayer w5: v1(1761.02,908.05) 1776.02,893.05 1776.02,873.24 1775.68,872.9 1775.68,833.4 1842.02,767.05 1902.02,767.05 1974.02,695.05 2462.02,695.05 2601.02,834.05 v1(2832.02,834.05)
I2C8_SDA: IC35.10 J48.26 R199.1 | length 3086.1
  TopLayer w5: IC35.10@1615.8,896.9 1668.68,896.9 R199.1@1678.52,887.05 1678.52,885.87 1698.68,865.71 v1(1793.02,865.71) ; v1(2833.02,873.05) 2902.02,942.05 3202.02,942.05 3303.02,841.05 3633.02,841.05 3731.02,743.05 4054.02,743.05 4159.02,638.05 4327.73,638.05 J48.26@4380.11,585.67
  BottomLayer w5: v1(1793.02,865.71) 1832.37,865.71 1988.02,710.05 2455.02,710.05 2589.02,844.05 2804.02,844.05 v1(2833.02,873.05)
INPUT_GND: FL1.3 J49.b2 J50.2 | length 11.9
  TopLayer w20: J50.2@5978.06,3419 J50.2@5990,3419
LVDS1_1_N: J40.3 J44.L35 | length 2756.8
  TopLayer w10: v1(1876.87,1541.05) 1872.02,1545.9 1872.02,1585.05 1973.02,1686.05 2557.02,1686.05 2557.41,1685.67 J40.3@2626.57,1685.67
  BottomLayer w5: J44.L35@161.21,1837.44 202.32,1837.44 243.29,1878.4 274.23,1878.4 279.95,1884.13 282.88,1887.05 369.17,1887.05 372.09,1884.13 470.59,1785.63 474.13,1785.63
  BottomLayer w10: 474.13,1785.63 506.7,1753.05 1720.24,1753.05 1872.02,1601.27 1872.02,1542.05 1873.02,1541.05 v1(1876.87,1541.05)
LVDS1_1_P: J40.2 J44.L1 | length 2792.9
  TopLayer w10: v1(1852.18,1541.05) 1857.02,1545.9 1857.02,1591.27 1966.81,1701.05 2567.25,1701.05 2567.63,1700.67 2571.64,1700.67 2615.14,1744.17 2643.76,1744.17 2685.25,1785.67 J40.2@2726.57,1785.67
  BottomLayer w5: J44.L1@253.73,1853.19 263.16,1853.19 287.02,1877.05 365.02,1877.05 463.52,1778.55 463.52,1775.02
  BottomLayer w10: 463.52,1775.02 500.49,1738.05 1714.02,1738.05 1857.02,1595.05 1857.02,1542.05 1856.02,1541.05 v1(1852.18,1541.05)
LVDS1_2_N: J40.6 J44.L36 | length 3290.2
  TopLayer w10: v1(1819.87,1515.05) 1815.02,1510.21 1815.02,1482.05 1825.02,1472.05 1884.81,1472.05 2013.81,1601.05 2527.25,1601.05 2527.63,1600.67 2582.89,1600.67 2609.38,1627.17 2643.76,1627.17 2685.25,1585.67 J40.6@2726.57,1585.67
  BottomLayer w5: J44.L36@115.94,1868.94 115.94,1814.91 135.79,1795.05 226.02,1795.05
  BottomLayer w10: 226.02,1795.05 240.02,1781.05 240.02,1490.84 414.81,1316.05 825.24,1316.05 891.24,1382.05 1770.24,1382.05 1817.02,1428.84 1817.02,1505.35 v1@1815.02,1507.35
LVDS1_2_P: J40.5 J44.L2 | length 3226.8
  TopLayer w10: v1(1795.18,1515.05) 1800.02,1510.21 1800.02,1475.84 1818.81,1457.05 1891.02,1457.05 2020.02,1586.05 2517.02,1586.05 2517.41,1585.67 J40.5@2626.57,1585.67
  BottomLayer w5: J44.L2@208.46,1884.68 186.43,1862.66 150.77,1862.66 127.17,1839.05 125.94,1839.05 125.94,1819.05 139.94,1805.05 217.02,1805.05 219.52,1807.55 234.74,1807.55 237.24,1805.05
  BottomLayer w10: 237.24,1805.05 255.02,1787.27 255.02,1497.05 421.02,1331.05 819.02,1331.05 885.02,1397.05 1764.02,1397.05 1802.02,1435.05 1802.02,1499.13 1800.02,1501.13 1800.02,1510.21 v1(1795.18,1515.05)
LVDS1_3_N: J40.9 J44.L37 | length 2913.3
  TopLayer w10: v1(2078.87,1474.05) 2074.02,1478.9 2074.02,1507.05 2099.02,1532.05 2569.58,1532.05 2591.92,1509.71 2585.07,1502.86 2585.07,1468.48 2626.57,1426.99 J40.9@2626.57,1385.67
  BottomLayer w5: J44.L37@161.21,1900.43 183.24,1922.46 224.35,1922.46 243.29,1941.4 264.18,1941.4 270.03,1935.54 413.81,1935.54 443.29,1965.02 464.18,1965.02 485.67,1943.52 514.31,1943.52 535.81,1965.02 556.7,1965.02 578.19,1943.52 629.02,1943.52 631.52,1946.02
  BottomLayer w10: 631.52,1946.02 1648.27,1946.02 2074.02,1520.27 2074.02,1478.9 v1(2078.87,1474.05)
LVDS1_3_P: J40.8 J44.L3 | length 2806.9
  TopLayer w10: v1(2054.18,1474.05) 2059.02,1478.9 2059.02,1513.27 2092.81,1547.05 2575.79,1547.05 2602.53,1520.32 2609.38,1527.17 2643.76,1527.17 2685.25,1485.67 J40.8@2726.57,1485.67
  BottomLayer w5: J44.L3@253.73,1916.18 263.1,1925.54 432.33,1925.54 443.29,1914.59 469.63,1914.59 488.56,1933.52 516.87,1933.52 535.81,1914.59 556.7,1914.59 575.63,1933.52 629.02,1933.52 631.52,1931.02
  BottomLayer w10: 631.52,1931.02 1642.06,1931.02 2059.02,1514.05 2059.02,1478.9 v1(2054.18,1474.05)
LVDS1_4_N: J40.12 J44.L38 | length 3267.7
  TopLayer w5: J44.L38@115.94,1931.93 136,1911.87 136,1889.99 150.77,1875.22 172.65,1875.22 202.52,1845.34 202.52,1797.05 200.02,1794.55
  TopLayer w10: 200.02,1794.55 200.02,1767.84 226.02,1741.84 226.02,1588.84 351.99,1462.87 v1(351.99,1456.02) ; v1(1765.87,1489.05) 1761.02,1484.21 1761.02,1436.05 1796.02,1401.05 2088.81,1401.05 2179.81,1492.05 2416.02,1492.05 2576.02,1332.05 2680.19,1332.05 J40.12@2726.57,1285.67
  BottomLayer w10: v1(351.99,1456.02) 358.84,1456.02 457.81,1357.05 800.02,1357.05 878.02,1435.05 1731.24,1435.05 1761.02,1464.84 1761.02,1484.21 v1(1765.87,1489.05)
LVDS1_4_P: J40.11 J44.L4 | length 3122.9
  TopLayer w5: J44.L4@208.46,1947.68 219.02,1937.11 219.02,1909.78 233.67,1895.13 233.67,1874.24 219.02,1859.59 219.02,1851.84 212.52,1845.34 212.52,1797.05 215.02,1794.55
  TopLayer w10: 215.02,1794.55 215.02,1774.05 241.02,1748.05 241.02,1595.05 362.6,1473.48 v1(369.45,1473.48) ; v1(1741.18,1489.05) 1746.02,1484.21 1746.02,1429.84 1789.81,1386.05 2095.02,1386.05 2186.02,1477.05 2409.81,1477.05 2569.81,1317.05 2595.19,1317.05 J40.11@2626.57,1285.67
  BottomLayer w10: v1(369.45,1473.48) 369.45,1466.63 464.02,1372.05 793.81,1372.05 871.81,1450.05 1725.02,1450.05 1746.02,1471.05 1746.02,1484.21 v1(1741.18,1489.05)
LVDS1_5_N: J40.15 J44.L39 | length 3098.8
  TopLayer w10: v1(2232.95,1357.13) 2232.95,1363.98 2287.02,1418.05 2383.58,1418.05 2591.92,1209.71 2585.07,1202.86 2585.07,1168.48 2626.57,1126.99 J40.15@2626.57,1085.67
  BottomLayer w5: J44.L39@161.21,1963.42 183.24,1985.45 218.9,1985.45 239.5,2006.05 421.33,2006.05 443.29,2028.01 464.18,2028.01 483.11,2009.07 516.87,2009.07 535.81,2028.01 556.7,2028.01 578.19,2006.52 629.02,2006.52 631.52,2009.02
  BottomLayer w10: 631.52,2009.02 1698.28,2009.02 2253.92,1453.37 2253.92,1384.95 2232.95,1363.98 v1(2232.95,1357.13)
LVDS1_5_P: J40.14 J44.L5 | length 2980.6
  TopLayer w10: v1(2215.49,1374.59) 2222.34,1374.59 2280.81,1433.05 2389.79,1433.05 2602.53,1220.32 2609.38,1227.17 2643.76,1227.17 2685.25,1185.67 J40.14@2726.57,1185.67
  BottomLayer w5: J44.L5@253.73,1979.17 270.61,1996.05 424.81,1996.05 443.29,1977.58 469.63,1977.58 488.56,1996.52 516.87,1996.52 535.81,1977.58 562.15,1977.58 581.08,1996.52 629.02,1996.52 631.52,1994.02
  BottomLayer w10: 631.52,1994.02 1692.06,1994.02 2238.92,1447.16 2238.92,1391.16 2222.34,1374.59 v1(2215.49,1374.59)
LVDS1_6_N: J40.18 J44.L40 | length 3281.3
  TopLayer w5: J44.L40@115.94,1994.92 122.22,1988.64 171.66,1988.64 187.41,1972.89 218.9,1972.89 250.4,1941.4 264.18,1941.4 279.02,1926.55 279.02,1837.05 255.02,1813.05 255.02,1798.05 252.52,1795.55
  TopLayer w10: 252.52,1795.55 252.52,1759.34 265.02,1746.84 265.02,1619.84 422.81,1462.05 577.52,1462.05 832.52,1207.05 2041.02,1207.05 2314.02,934.05 2674.95,934.05 J40.18@2726.57,985.67
LVDS1_6_P: J40.17 J44.L6 | length 3113.8
  TopLayer w5: J44.L6@208.46,2010.67 225.07,1994.05 232.95,1994.05 243.29,2004.39 264.18,2004.39 289.02,1979.54 289.02,1832.91 265.02,1808.91 265.02,1798.05 267.52,1795.55
  TopLayer w10: 267.52,1795.55 267.52,1765.55 280.02,1753.05 280.02,1626.05 429.02,1477.05 583.74,1477.05 838.74,1222.05 2047.24,1222.05 2320.24,949.05 2589.95,949.05 J40.17@2626.57,985.67
LVDS1_7_N: J40.21 J44.L41 | length 3507.9
  TopLayer w10: v1(2360.95,781.13) 2360.95,787.98 2389.02,816.05 2471.81,816.05 2503.81,784.05 2624.95,784.05 J40.21@2626.57,785.67
  BottomLayer w5: J44.L41@161.21,2026.42 183.24,2048.44 218.9,2048.44 238.51,2068.05 420.34,2068.05 443.29,2091 464.18,2091 483.11,2072.07 516.87,2072.07 535.81,2091 556.7,2091 578.19,2069.51 606.11,2069.51 607.57,2068.05 632.02,2068.05 634.52,2070.55
  BottomLayer w10: 634.52,2070.55 1769.74,2070.55 1895.02,1945.27 1895.02,1911.27 2377.92,1428.37 2377.92,804.95 2360.95,787.98 v1(2360.95,781.13)
LVDS1_7_P: J40.20 J44.L7 | length 3511.7
  TopLayer w10: v1(2343.49,798.59) 2350.34,798.59 2382.81,831.05 2478.02,831.05 2510.02,799.05 2581.27,799.05 2609.38,827.17 2668.07,827.17 J40.20@2726.57,885.67
  BottomLayer w5: J44.L7@253.73,2042.16 269.62,2058.05 425.8,2058.05 443.29,2040.57 469.63,2040.57 488.56,2059.51 516.87,2059.51 535.81,2040.57 562.15,2040.57 581.08,2059.51 601.97,2059.51 603.43,2058.05 632.02,2058.05 634.52,2055.55
  BottomLayer w10: 634.52,2055.55 1763.52,2055.55 1880.02,1939.05 1880.02,1905.05 2362.92,1422.16 2362.92,811.16 2350.34,798.59 v1(2343.49,798.59)
LVDS1_8_N: J40.24 J44.L42 | length 3538
  TopLayer w5: J44.L42@115.94,2057.91 122.22,2051.63 171.66,2051.63 174.85,2048.44 224.35,2048.44 243.29,2067.38 264.18,2067.38 278.95,2052.61 278.95,2018.91 305.02,1992.84 305.02,1826.43 290.02,1811.43 290.02,1796.05 287.52,1793.55
  TopLayer w10: 287.52,1793.55 287.52,1773.84 299.02,1762.34 299.02,1657.84 452.81,1504.05 708.24,1504.05 932.02,1280.27 932.02,1259.9 v1(927.18,1255.05) ; v1(1324.02,1145.9) 1328.87,1141.05 2006.24,1141.05 2276.02,871.27 2276.02,811.05 2351.02,736.05 2676.19,736.05 J40.24@2726.57,685.67
  BottomLayer w10: v1(927.18,1255.05) 932.02,1259.9 932.02,1280.27 950.81,1299.05 1010.24,1299.05 1168.24,1141.05 1319.18,1141.05 v1(1324.02,1145.9)